# Altium PCB sensormodule_bak_010118.PcbDoc
Units mm, origin at the board's own origin, x right, y up, seen from the top; angles counter-clockwise.
Board outline 30 x 10 mm, 4 copper layers (Top Layer, Power Layer, Ground Layer, Bottom Layer), stack 0.651 mm thick; 27 components, 24 nets, 122 pads, 36 vias.
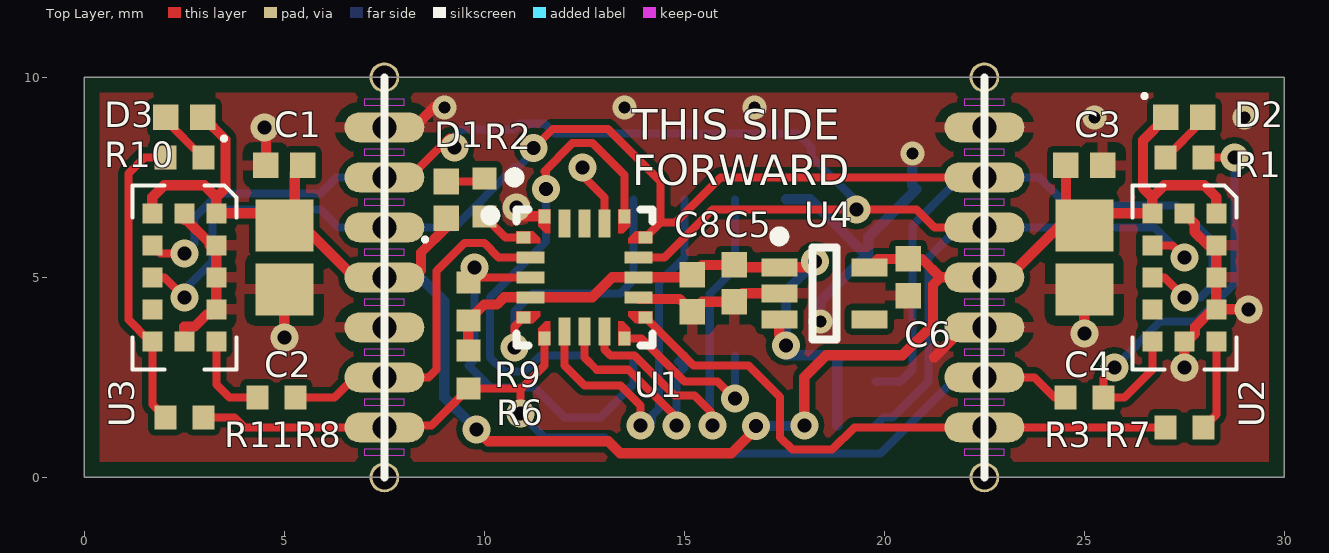
[diagram p0: Top Layer view]
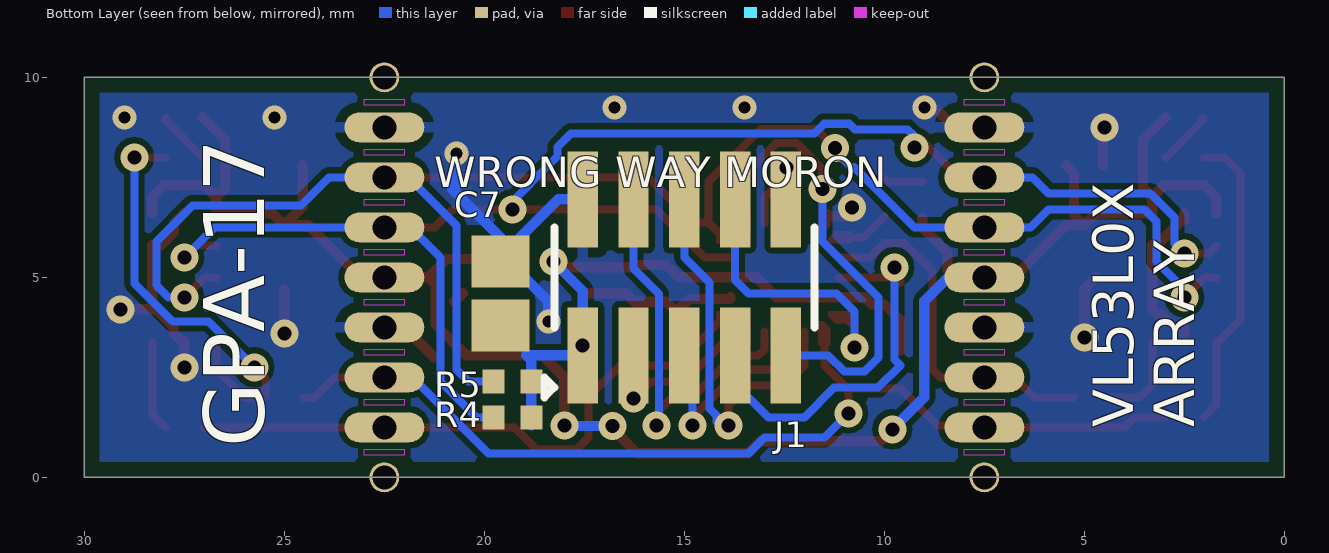
[diagram p1: Bottom Layer view, seen from below]
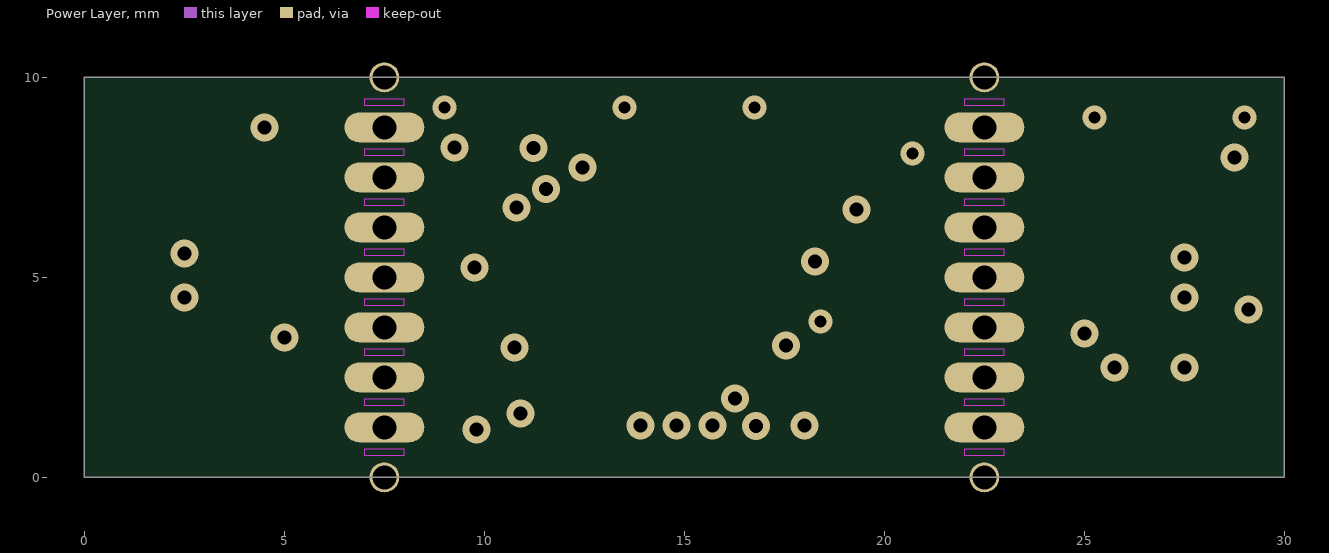
[diagram p2: Power Layer]
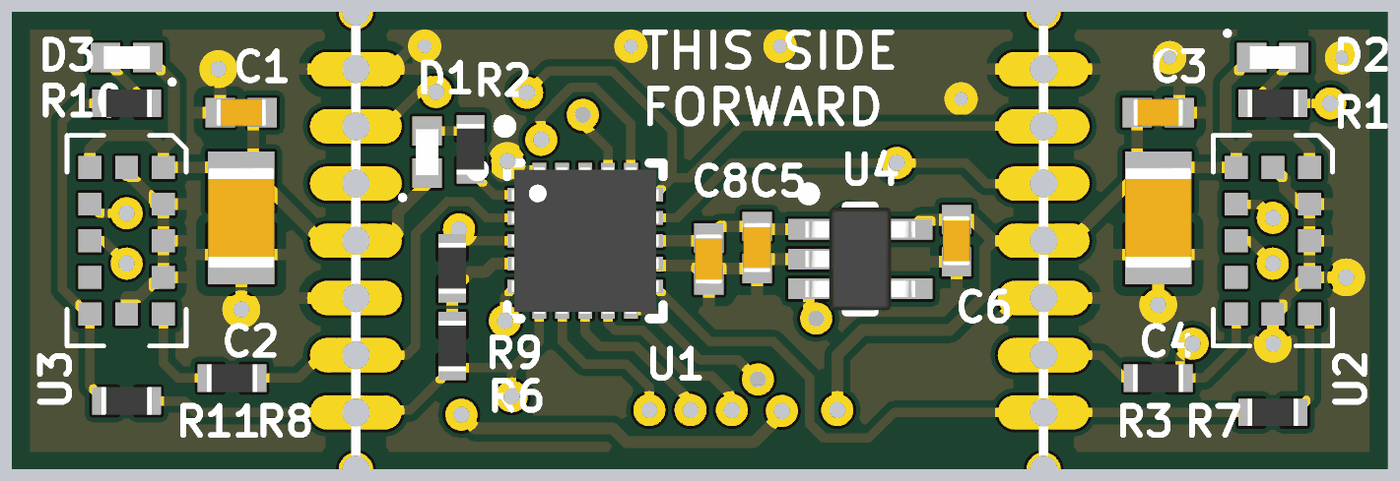
[diagram p3: 3D render of the assembled board from above, using the file's embedded part models]
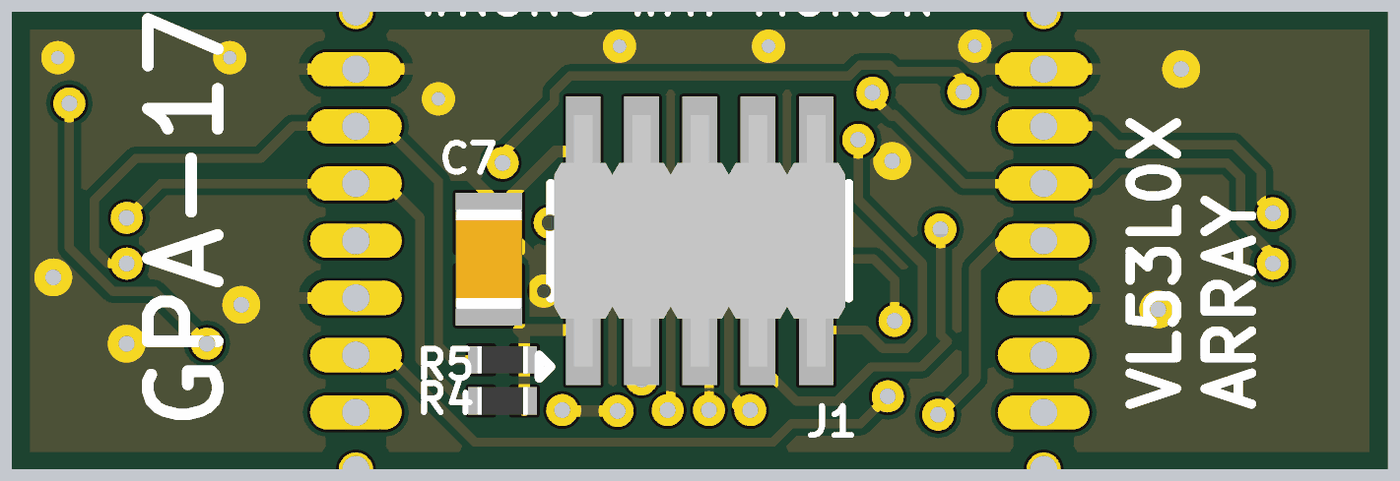
[diagram p4: 3D render of the assembled board from below, using the file's embedded part models]

## Layer stack, top to bottom
Top Solder: solder mask 0.0102, Solder Resist, Dk 3.5
Top Layer: signal copper 0.0356
Dielectric 1: prepreg 0.127, FR-4, Dk 4.2
Power Layer: signal copper 0.036
Dielectric 3: core 0.254, FR-4, Dk 4.2
Ground Layer: signal copper 0.036
Dielectric 2: prepreg 0.127, FR-4, Dk 4.2
Bottom Layer: signal copper 0.0356
Bottom Solder: solder mask 0.0102, Solder Resist, Dk 3.5

## Board outline
0,0 30,0 30,10 0,10

## Design rules (kind name [scope] priority, off if disabled: settings)
BoardOutlineClearance [All] p1: gap=0.381 ignorepadtopadclearanceinfootprint=FALSE
Clearance [All] p1: gap=0.152 ignorepadtopadclearanceinfootprint=FALSE
MinimumSolderMaskSliver [All] p1: minsoldermaskwidth=0.102
PlaneClearance [All] p1: clearance=0.152
PlaneConnect PlaneConnect_1 [IsVia and InNet('GND')] p1: planeconnectstyle=Direct reliefexpansion=0.508 reliefentries=4 reliefconductorwidth=0.254 reliefairgap=0.254
PlaneConnect [All] p2: planeconnectstyle=Relief reliefexpansion=0.508 reliefentries=4 reliefconductorwidth=0.254 reliefairgap=0.254
PolygonConnect PolygonConnect_1 [IsVia and InNet('GND')] p1: thpad.connectstyle=Relief thpad.reliefconductorwidth=0.254 thpad.reliefentries=4 thpad.polygonreliefangle="90 Angle" thpad.airgapwidth=0.254 smdpad.connectstyle=Relief smdpad.reliefconductorwidth=0.254 smdpad.reliefentries=4 smdpad.polygonreliefangle="90 Angle" smdpad.airgapwidth=0.254 via.connectstyle=Direct via.reliefconductorwidth=0.254 via.reliefentries=4 via.polygonreliefangle="90 Angle" via.airgapwidth=0.254
PolygonConnect [All] p2: connectstyle=Relief reliefconductorwidth=0.254 reliefentries=4 polygonreliefangle="90 Angle" airgapwidth=0.254
RoomDefinition sensormodule [InComponentClass('sensormodule')] p1: confinementstyle=ConfineIn formatcopy=TRUE lockcomponents=FALSE outline 0,0 112.8,0 112.8,21 0,21
RoutingVias [All] p1: holewidth=0.35 width=0.7 viastyle="Through Hole" minholewidth=0.254 minwidth=0.508 maxholewidth=5 maxwidth=10
SolderMaskExpansion SolderMaskExpansion_1 [IsVia and not (InNet('SWC/TX') or InNet('SWD/RX') or InNet('RST'))] p1: expansion=-5
SolderMaskExpansion [All] p2: expansion=0.064
Width Width_1 [InNetClass('pwr')] p1: maxlimit=0.508 minlimit=0.152 preferedwidth=0.254
Width [All] p2: maxlimit=0.508 minlimit=0.127 preferedwidth=0.203
27 further rules are at their usual default settings.

## Classes and differential pairs
net class pwr: GND VDD_2V8 VIN

## Components (designator, comment, footprint, x,y, rotation, side; value= is the part's Value field where it differs from the comment)
C1 "cap" CAPC1005X06N 5,7.8 r0 top value=100n
C2 "cap" CAPC2012X11N 5,5.5 r90 top value=4u7
C3 "cap" CAPC1005X06N 25,7.8 r180 top value=100n
C4 "cap" CAPC2012X11N 25,5.5 r90 top value=4u7
C5 "cap" CAPC1005X06N 16.25,4.85 r90 top value=100n
C6 "cap" CAPC1005X06N 20.6,5 r90 top value=100n
C7 "cap" CAPC2012X11N 19.6,4.6 r270 bottom value=4u7
C8 "cap" CAPC1005X06N 15.2,4.6 r90 top value=100n
D1 "led" CAPCP1005X06N 9.052,6.936 r90 top value=RED
D2 "led" CAPCP1005X06N 27.5,9 r0 top value=RED
D3 "led" CAPCP1005X06N 2.5,9 r180 top value=RED
J1 "2x5" hdr_2x5_50mil 15,5 r180 bottom
R1 "res" RESC1005X04N 27.5,8 r180 top value=470R
R2 "res" RESC1005X04N 10,7 r90 top value=10K
R3 "res" RESC1005X04N 25,2 r0 top value=4K7
R4 "res" RESC1005X04N 19.3,1.5 r180 bottom value=47K
R5 "res" RESC1005X04N 19.3,2.4 r180 bottom value=47K
R6 "res" RESC1005X04N 9.6,2.7 r90 top value=47K
R7 "res" RESC1005X04N 27.5,1.25 r0 top value=1K
R8 "res" RESC1005X04N 4.8,2 r180 top value=1K
R9 "res" RESC1005X04N 9.6,4.4 r270 top value=10K
R10 "res" RESC1005X04N 2.5,8 r0 top value=470R
R11 "res" RESC1005X04N 2.5,1.5 r180 top value=4K7
U1 "STM32L011F4" QFN50P300X300X60-20N 12.5,5 r0 top
U2 "VL53L0X" LGA12C80P3X5_240X440X105 27.5,5 r0 top
U3 "VL53L0X" LGA12C80P3X5_240X440X105 2.5,5 r0 top
U4 "MIC5365/6" SOT65P210X110-5N 18.5,4.6 r0 top

## Footprints (in the part's own frame and the unit in brackets; to place one, negate y for a bottom-side part, rotate by r counter-clockwise, add the part's x,y. Pads: shape width x height; smd on the part's side, far side on the other; paste and mask are expansions set on the pad)
CAPC1005X06N [mm] "Chip Capacitor, 2-Leads, Body 1.00x0.50mm, IPC Medium Density"
  rect 0.64x0.64 smd: 1(-0.46,0) 2(0.46,0)
  body extent -0.55,-0.3 0.55,0.3, height 0.6
CAPC2012X11N [mm] "Chip Capacitor, 2-Leads, Body 2.00x1.25mm, IPC Medium Density"
  rect 1.3x1.45 smd: 1(-0.8,0) 2(0.8,0)
  body extent -1.1,-0.72 1.1,0.72, height 1.1
CAPCP1005X06N [mm] "Chip Capacitor, 2-Leads, Body 1.00x0.50mm, IPC Medium Density"
  rect 0.64x0.64 smd: 1(-0.46,0) 2(0.46,0)
  silkscreen extent -1.04,0.48 -0.94,0.58, body extent -0.5,-0.25 0.5,0.25, height 0.5
hdr_2x5_50mil [mm] "2x5 Pin header, 50mil pitch"
  rect 0.76x2.4 smd: 1(-2.54,-1.95) 2(-2.54,1.95) 2(-2.54,1.95) 3(-1.27,-1.95) 4(-1.27,1.95) 5(0,-1.95) 6(0,1.95) 7(1.27,-1.95) 8(1.27,1.95) 9(2.54,-1.95) 10(2.54,1.95)
  silkscreen extent -3.5,-3 3.25,1.25, body extent -3.17,-2.75 3.18,2.75, height 4.5
LGA12C80P3X5_240X440X105 [mm] "LGA, 12-Leads, Body 2.40x4.40mmx1.05mm, Pitch 0.80mm"
  rect 0.5x0.5 smd: 1(0.8,1.6) 2(0.8,0.8) 3(0.8,0) 4(0.8,-0.8) 5(0.8,-1.6) 6(0,-1.6) 7(-0.8,-1.6) 8(-0.8,-0.8) 9(-0.8,0) 10(-0.8,0.8) 11(-0.8,1.6) 12(0,1.6)
  silkscreen extent -1.3,-2.3 1.3,2.3, body extent -1.2,-2.2 1.2,2.2, height 1
QFN50P300X300X60-20N [mm] "QFN, 20-Leads, Body 3.00x3.00mm, Pitch 0.50mm, IPC Medium Density"
  rect 0.35x0.3 smd: 1(-1.525,1) 5(-1.525,-1) 11(1.525,-1) 15(1.525,1)
  rect 0.7x0.3 smd: 2(-1.35,0.5) 3(-1.35,0) 4(-1.35,-0.5) 12(1.35,-0.5) 13(1.35,0) 14(1.35,0.5)
  rect 0.3x0.35 smd: 6(-1,-1.525) 10(1,-1.525) 16(1,1.525) 20(-1,1.525)
  rect 0.3x0.7 smd: 7(-0.5,-1.35) 8(0,-1.35) 9(0.5,-1.35) 17(0.5,1.35) 18(0,1.35) 19(-0.5,1.35)
  Top Layer region: 1.7,-0.85 1.1,-0.85 1.1,-0.975 1.275,-1.15 1.7,-1.15
  Top Layer region: 0.85,-1.7 0.85,-1.1 0.975,-1.1 1.15,-1.275 1.15,-1.7
  Top Layer region: 1.7,0.85 1.1,0.85 1.1,0.975 1.275,1.15 1.7,1.15
  Top Layer region: 0.85,1.7 0.85,1.1 0.975,1.1 1.15,1.275 1.15,1.7
  Top Layer region: -0.85,1.7 -0.85,1.1 -0.975,1.1 -1.15,1.275 -1.15,1.7
  Top Layer region: -1.7,0.85 -1.1,0.85 -1.1,0.975 -1.275,1.15 -1.7,1.15
  Top Layer region: -1.7,-0.85 -1.1,-0.85 -1.1,-0.975 -1.275,-1.15 -1.7,-1.15
  Top Layer region: -0.85,-1.7 -0.85,-1.1 -0.975,-1.1 -1.15,-1.275 -1.15,-1.7
  silkscreen extent -2.47,-1.7 1.7,1.7, body extent -1.6,-1.6 1.6,1.6, height 0.6
RESC1005X04N [mm] "Chip Resistor, 2-Leads, Body 1.05x0.54mm, IPC Medium Density"
  rect 0.55x0.6 smd: 1(-0.475,0) 2(0.475,0)
  body extent -0.55,-0.3 0.55,0.3, height 0.4
SOT65P210X110-5N [mm] "SOT23, 5-Leads, Body 2.03x2.10mm, Pitch 0.65mm, IPC Medium Density"
  rect 0.9x0.45 smd: 1(-1.125,0.65) 2(-1.125,0) 3(-1.125,-0.65) 4(1.125,-0.65) 5(1.125,0.65)
  silkscreen extent -1.25,-1.15 0.3,1.55, body extent -1.2,-1.12 1.2,1.12, height 1.1

## Part data
C1 C2 C3 C4 C5 C6 C7 C8: "Capacitor"
D1 D2 D3: "LED"
J1: library part hdr_2x5, "2x5 Header"
R1 R2 R3 R4 R5 R6 R7 R8 R9 R10 R11: "Resistor"
U1: library part stm32l011f4u
U2 U3: library part vl53l0x, "vl53l0x ToF sensor"
U4: library part mic5365, "5pin voltage regulator"

## Free pads (board coordinates)
  rrect100% 2x0.75 hole 0.6: 2(7.5,5) 2(22.5,5) 3(7.5,3.75) 3(22.5,3.75) 4(7.5,6.25) 4(22.5,6.25) 5(7.5,7.5) 5(22.5,7.5) 6(7.5,2.5) 6(22.5,2.5) 7(7.5,1.25) 7(22.5,1.25) 8(7.5,8.75) 8(22.5,8.75)
  rrect100% 0.75x0.75 hole 0.6: 9(7.5,0) 9(7.5,10) 9(22.5,0) 9(22.5,10)

## Via types
v1: diameter 0.7, hole 0.35, Top Layer to Bottom Layer, 29 vias
v2: diameter 0.6, hole 0.3, Top Layer to Bottom Layer, 7 vias

## Nets (pads, with @x,y where several pads share a name; then routed paths per layer and width w, separated by ;. In a path a pad name is that pad's centre, name@x,y a point inside that pad or via, vN(x,y) a via of type N, cw(c..) or ccw(c..) an arc to the next point about the centre after c; other vN are vias at no path point)
GND: C1.1 C2.1 C3.1 C4.1 C5.1 C6.1 C7.1 C8.1 J1.2 pad.3 pad.8 U1.12 U1.20 U2.2 U2.3 U2.4 U2.6 U2.12 U3.2 U3.3 U3.4 U3.6 U3.12 U4.2 | length 30
  Top Layer w0.254: U3.6 2.5,3.771 2.761,3.771 3.061,4.071 3.171,4.071 U3.4 U3.3 U3.2 3.129,5.8 3.129,5.861 2.561,6.429 2.5,6.429 U3.12 ; v1(4.5,8.75) 4.5,8.6 4.54,8.56 C1.1 ; C2.1@4.7,5 C2.1 v1(5,3.5) v1@5.1,3.4 ; pad.8@7.5,8.75 8.25,8.75 8.75,9.25 v2(9,9.25) ; v1(10.802,6.742) 10.802,6.652 10.93,6.525 U1.20 ; U1.12 13.85,4.461 14.879,4.461 C8.1 15.45,4.39 C5.1 16.46,4.6 U4.2 ; C6.1@20.54,4.6 C6.1@20.75,4.39 ; 21.25,3 22,3.75 pad.3@22.5,3.75 ; v1(25,3.6) C4.1 ; v1(27.5,2.75) U2.6 ; U2.12 27.761,6.339 27.761,6.129 28.09,5.8 U2.2 U2.3 U2.4 ; U2.6@27.571,3.4 27.771,3.6 27.771,3.766 28.205,4.2 U2.4 ; v1(29.1,4.2) U2.4
  Power Layer w0.254: v1@10.7,6.7 10.748,6.652 10.802,6.707 v1(10.802,6.742)
  Bottom Layer w0.254: J1.2@17.54,6.95 18.15,6.95 C7.1@19.6,5.5 ; v2(18.4,3.9) 18.4,4.4 19.4,5.4 C7.1 C7.1@19.6,5.5 ; v2(20.7,8.1) 20.7,7.3 20.8,7.2 19.6,6 C7.1@19.6,5.5
  other v2: 25.25,9 29,9 13.5,9.25 16.75,9.25
MISO: J1.4 U1.9 | length 10.1
  Top Layer w0.203: U1.9 13,3.2 13.154,3.046 13.754,3.046 14.756,2.044 15.256,2.044 15.666,1.634 15.666,1.334 v1(15.7,1.3)
  Bottom Layer w0.203: v1(15.7,1.3) 15.636,1.364 15.636,4.586 16.27,5.22 J1.4
MOSI: J1.3 U1.10 | length 4.5
  Top Layer w0.203: U1.10 13.925,3.475 15,2.4 15.83,2.4 16.26,1.97 v1(16.27,1.97)
  Bottom Layer w0.203: v1(16.27,1.97) J1.3
nCS: J1.6 U1.7 | length 10.2
  Top Layer w0.203: U1.7 12,2.8 12.5,2.3 13.4,2.3 13.9,1.8 v1(13.9,1.3)
  Bottom Layer w0.203: v1(13.9,1.3) 13.9,1.103 14.196,1.399 14.196,1.55 14.366,1.72 14.366,4.866 15,5.5 J1.6
NetD1_C: D1.2 R2.2 | length 1
  Top Layer w0.203: D1.2 9.921,7.396 R2.2
NetD2_C: D2.2 R1.2 | length 1.4
  Top Layer w0.203: R1.2 27.039,8 27.96,8.921 D2.2
NetD3_C: D3.2 R10.2 | length 1.4
  Top Layer w0.203: D3.2 2.04,8.921 2.961,8 R10.2
NetR1_1: R1.1 R3.2 U2.7 | length 10.9
  Top Layer w0.203: v1(25.75,2.75) 25.475,2.475 R3.2 26,2 26.7,2.7 U2.7 ; R1.1 v1(28.75,8)
  Bottom Layer w0.203: v1(25.75,2.75) 26.896,3.896 27.799,3.896 28.75,4.847 v1(28.75,8)
NetR2_1: R2.1 U1.1 | length 1.2
  Top Layer w0.203: R2.1 10.525,6 U1.1
NetR3_1: pad.6@22.5,2.5 pad.7@7.5,1.25 R3.1 R6.1 R11.1 U1.6 | length 25.6
  Top Layer w0.203: R11.1 3.75,1.5 4,1.25 7.5,1.25 7.55,1.3 8.675,1.3 R6.1 10.925,2.225 ; v1(10.9,1.6) 10.9,2.2 10.925,2.225 ; U1.6 11.5,2.8 10.925,2.225 ; pad.6@22.5,2.5 23.75,2.5 24.25,2 R3.1
  Bottom Layer w0.203: v1(10.9,1.6) 11.5,1 13,1 13.4,0.6 19.9,0.6 21.8,2.5 pad.6@22.5,2.5
NetR7_2: R7.2 U2.5 | length 2.3
  Top Layer w0.203: R7.2 28.3,1.575 U2.5
NetR8_2: R8.2 U3.5 | length 2.2
  Top Layer w0.203: U3.5 3.3,2.325 3.625,2 R8.2
NetR10_1: R10.1 R11.2 U3.7 | length 7.6
  Top Layer w0.203: R11.2 1.7,1.825 U3.7 1.641,3.4 1.1,3.941 1.1,7.6 1.5,8 R10.1
RST: J1.7 R9.1 U1.3 | length 10.1
  Top Layer w0.203: R9.1 R9.1@9.75,5.025 ; v1(9.75,5.25) R9.1@9.75,5.025 ; U1.3 9.775,5 R9.1@9.75,5.025
  Bottom Layer w0.203: v1(9.75,5.25) 9.75,2.95 9.6,2.8 10.156,2.244 11.256,2.244 12,1.5 12.9,1.5 13.73,2.33 J1.7
SCK: J1.5 U1.8 | length 5.9
  Top Layer w0.203: U1.8 12.5,3 12.81,2.69 13.607,2.69 14.8,1.497 v1(14.8,1.3) 14.8,1.295 v1@14.899,1.196
  Bottom Layer w0.203: v1(14.8,1.3) 14.8,2.545 15,2.745 14.848,2.898 J1.5
SCL: pad.4@22.5,6.25 pad.5@7.5,7.5 R4.1 U1.14 U2.10 U3.10 | length 43.4
  Top Layer w0.203: U3.10 1.9,5.6 v1(2.5,5.6) ; pad.5@7.5,7.5 8.128,7.5 9.128,8.5 9.25,8.378 v1(9.25,8.25) ; U1.14 14.5,5.5 15.7,6.7 v1(19.3,6.7) 20.8,6.7 21.25,6.25 pad.4@22.5,6.25 ; U2.10 27.2,5.8 v1(27.5,5.5)
  Bottom Layer w0.203: v1(2.5,5.6) 2.75,5.85 2.75,6.5 3.35,7.1 5.9,7.1 6.3,7.5 pad.5@7.5,7.5 ; v1(9.25,8.25) 9.25,8.529 9.417,8.696 10.729,8.696 10.871,8.838 11.512,8.838 11.75,8.6 17.829,8.6 18.174,8.255 18.174,8.026 19.5,6.7 v1(19.3,6.7) ; R4.1@19.775,1.3 19.975,1.5 20.2,1.5 21.1,2.4 21.1,5.5 21.85,6.25 22.5,6.25 26.75,6.25 v1(27.5,5.5)
SDA: pad.4@7.5,6.25 pad.5@22.5,7.5 R5.1 U1.15 U2.9 U3.9 | length 42.7
  Top Layer w0.203: U3.9 2,5 v1(2.5,4.5) ; v1(11.234,8.234) 11.71,8.71 13.09,8.71 14.4,7.4 14.4,6.375 ; U1.15 14.4,6.375 ; pad.5@22.5,7.5 15.9,7.5 14.775,6.375 14.4,6.375 ; U2.9 27,5 v1(27.5,4.5)
  Bottom Layer w0.203: v1(2.5,4.5) 2.5,4.7 2.9,5.1 3.2,5.4 3.2,6.4 3.5,6.7 5.9,6.7 6.35,6.25 7.5,6.25 9.25,6.25 10.758,7.758 10.802,7.713 11.234,8.145 v1(11.234,8.234) ; R5.1 20.4,2.4 20.7,2.7 20.7,6.3 21.9,7.5 22.5,7.5 23.88,7.5 24.58,6.8 27.3,6.8 28.2,5.9 28.2,4.8 27.9,4.5 v1(27.5,4.5)
SINT: J1.8 U1.5 | length 7.1
  Top Layer w0.203: v1(10.75,3.25) 10.75,3.775 U1.5
  Bottom Layer w0.203: v1(10.75,3.25) 10.75,4.15 11.2,4.6 13.4,4.6 13.73,4.93 J1.8
SWC/TX: J1.10 U1.17 | length 1.8
  Top Layer w0.203: v1(12.45,7.75) 12.45,7.55 13,7 U1.17
  Bottom Layer w0.203: v1(12.45,7.75) 12.45,7.61 12.46,7.6 12.484,7.6 J1.10@12.492,7.592
SWD/RX: J1.9 U1.16 | length 11.5
  Top Layer w0.203: v1(11.543,7.207) 11.543,7.602 11.5,7.646 11.838,7.984 11.838,7.992 12.2,8.354 12.7,8.354 13.5,7.554 U1.16
  Bottom Layer w0.203: v1(11.543,7.207) 11.543,5.893 10.146,4.496 10.146,3 10.5,2.646 11,2.646 11.404,3.05 J1.9
VDD_2V8: C1.2 C2.2 C3.2 C4.2 C6.2 D1.1 D2.1 D3.1 pad.2 U2.1 U2.11 U3.1 U3.11 U4.5 | length 49.1
  Top Layer w0.254: U3.11 1.7,7 2,7.3 3,7.3 3.3,7 ; D3.1 2.975,9 3.529,8.445 3.529,7.229 3.3,7 ; C1.2 5.26,7.6 5.26,6.56 C2.2 ; D1.1 9.052,6.251 8.419,5.619 8.419,5.169 8.25,5 7.5,5 6.75,5 5.45,6.3 C2.2 ; v1(9.8,1.2) 10.1,0.9 13.1,0.9 13.4,0.6 16.181,0.6 16.792,1.211 v1(16.792,1.281) ; v1(18,1.3) 18,2.5 18.55,3.05 20.45,3.05 21.221,3.821 21.221,4.821 21.4,5 ; U4.5 19.835,5.46 C6.2 20.94,5.46 21.4,5 ; C3.2 24.54,6.76 C4.2 ; D2.1 26.471,8.431 26.471,7.229 26.7,7 ; U2.1 28.3,7 28,7.3 27,7.3 26.7,7 ; 3.3,7 U3.1 4.7,6.6 C2.2 ; 21.4,5 22.5,5 23.1,5 24.4,6.3 C4.2 ; C4.2 25.3,6.6 U2.11 26.7,7
  Bottom Layer w0.254: pad.2@7.5,5 8.4,5 9,4.4 9,2 v1(9.8,1.2) ; v1(16.792,1.281) 17.981,1.281 v1(18,1.3)
VIN: C5.2 C7.2 C8.2 J1.1 R4.2 R5.2 R6.2 R9.2 U1.4 U1.13 U4.1 U4.3 | length 16.7
  Top Layer w0.254: R6.2 R9.2 9.996,4.321 10.321,4.321 10.5,4.5 U1.4 12.7,4.5 13.2,5 U1.13 15.14,5 C8.2 15.45,5.31 C5.2 16.31,5.25 U4.1 18.15,5.25 18.273,5.373 v1(18.273,5.392) ; U4.3 17.375,3.565 17.54,3.4 v1(17.54,3.3)
  Bottom Layer w0.254: v1(18.273,5.392) 17.54,4.66 v1(17.54,3.3) J1.1 18.95,3.05 18.825,2.925 R5.2 R4.2 R4.2@18.825,1.3
XSH1: pad.6@7.5,2.5 R8.1 U1.2 | length 9.1
  Top Layer w0.203: R8.1 6.25,2 6.75,2.5 7.5,2.5 8.6,2.5 8.8,2.7 8.8,5.154 9.501,5.856 9.503,5.854 10,5.854 10.354,5.5 U1.2
XSH2: pad.7@22.5,1.25 R7.1 U1.11 | length 15.2
  Top Layer w0.203: U1.11 15.225,2.8 16.6,2.8 17.396,2.004 17.396,1 17.7,0.696 18.696,0.696 19.25,1.25 22.5,1.25 R7.1
pads on no net: U1.18 U1.19 U2.8 U3.8 U4.4

## Polygon pours and split planes (outlines as drawn)
GND on Top Layer "Top Layer-No Net" (solid, pour order 0): 0,0 30,0 30,10 0,10
GND on Bottom Layer "Top Layer-No Net1" (solid, pour order 1): 0,0 30,0 30,10 0,10

## Keep-outs
Keep-Out Layer:
  rectangle: 7,9.3 8,9.45
  rectangle: 7,8.05 8,8.2
  rectangle: 7,6.8 8,6.95
  rectangle: 7,5.55 8,5.7
  rectangle: 7,4.3 8,4.45
  rectangle: 7,3.05 8,3.2
  rectangle: 7,1.8 8,1.95
  rectangle: 7,0.55 8,0.7
  rectangle: 22,0.55 23,0.7
  rectangle: 22,1.8 23,1.95
  rectangle: 22,3.05 23,3.2
  rectangle: 22,4.3 23,4.45
  rectangle: 22,5.55 23,5.7
  rectangle: 22,6.8 23,6.95
  rectangle: 22,8.05 23,8.2
  rectangle: 22,9.3 23,9.45

## Silkscreen, mask and mechanical layers (free items; w line width, h text height)
Top Overlay:
  circle w0.254: c10.75,7.5 r0.125
  lines w0.2: 7.5,0 7.5,10 ; 22.5,0 22.5,10
  text "THIS SIDE / FORWARD" at 13.7,7.3 h0.76
Bottom Overlay:
  text "WRONG WAY MORON" at 21.25,7.25 h0.76
  text "VL53L0X / ARRAY" at 2.25,1.25 h1.02 r270
  text "GPA-17" at 25.5,0.75 h1.52 r270